# EAGLE board ODGIRON_steel_0412 - 副本 (EAGLE 9.6.0), part 1 of 2
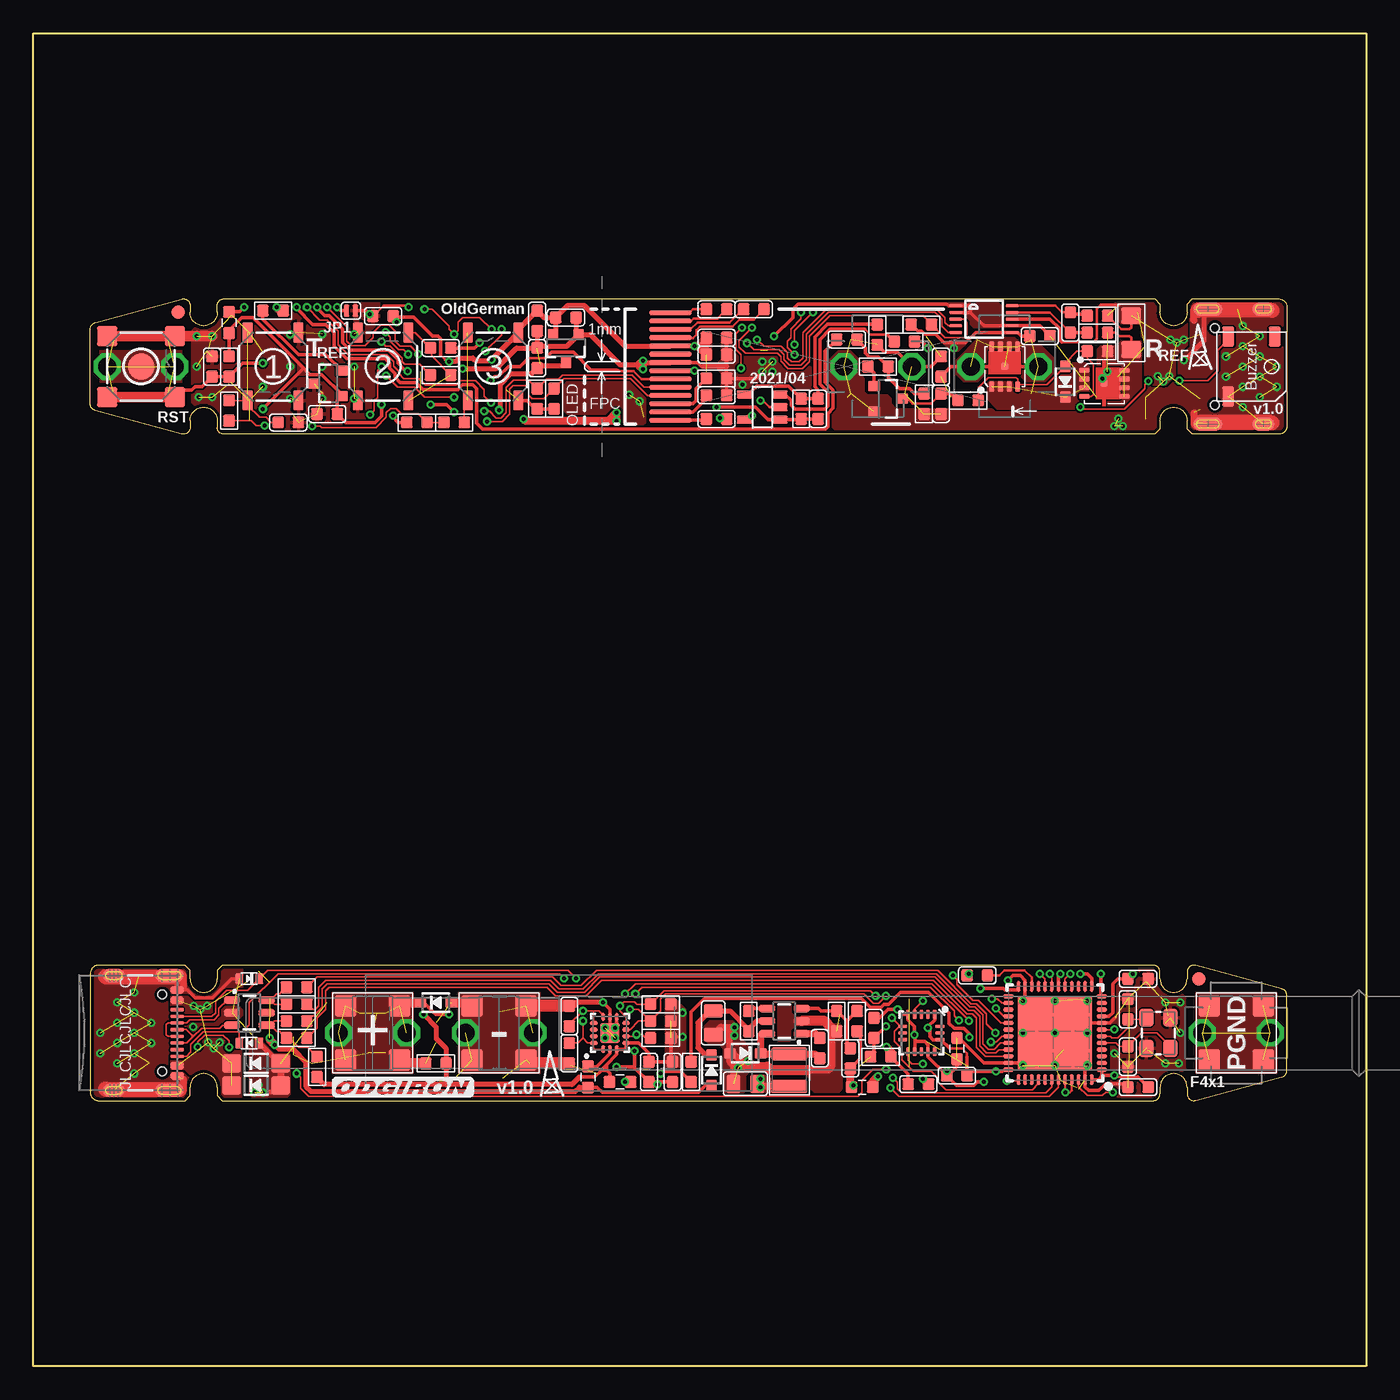
[diagram p0: board, top side]
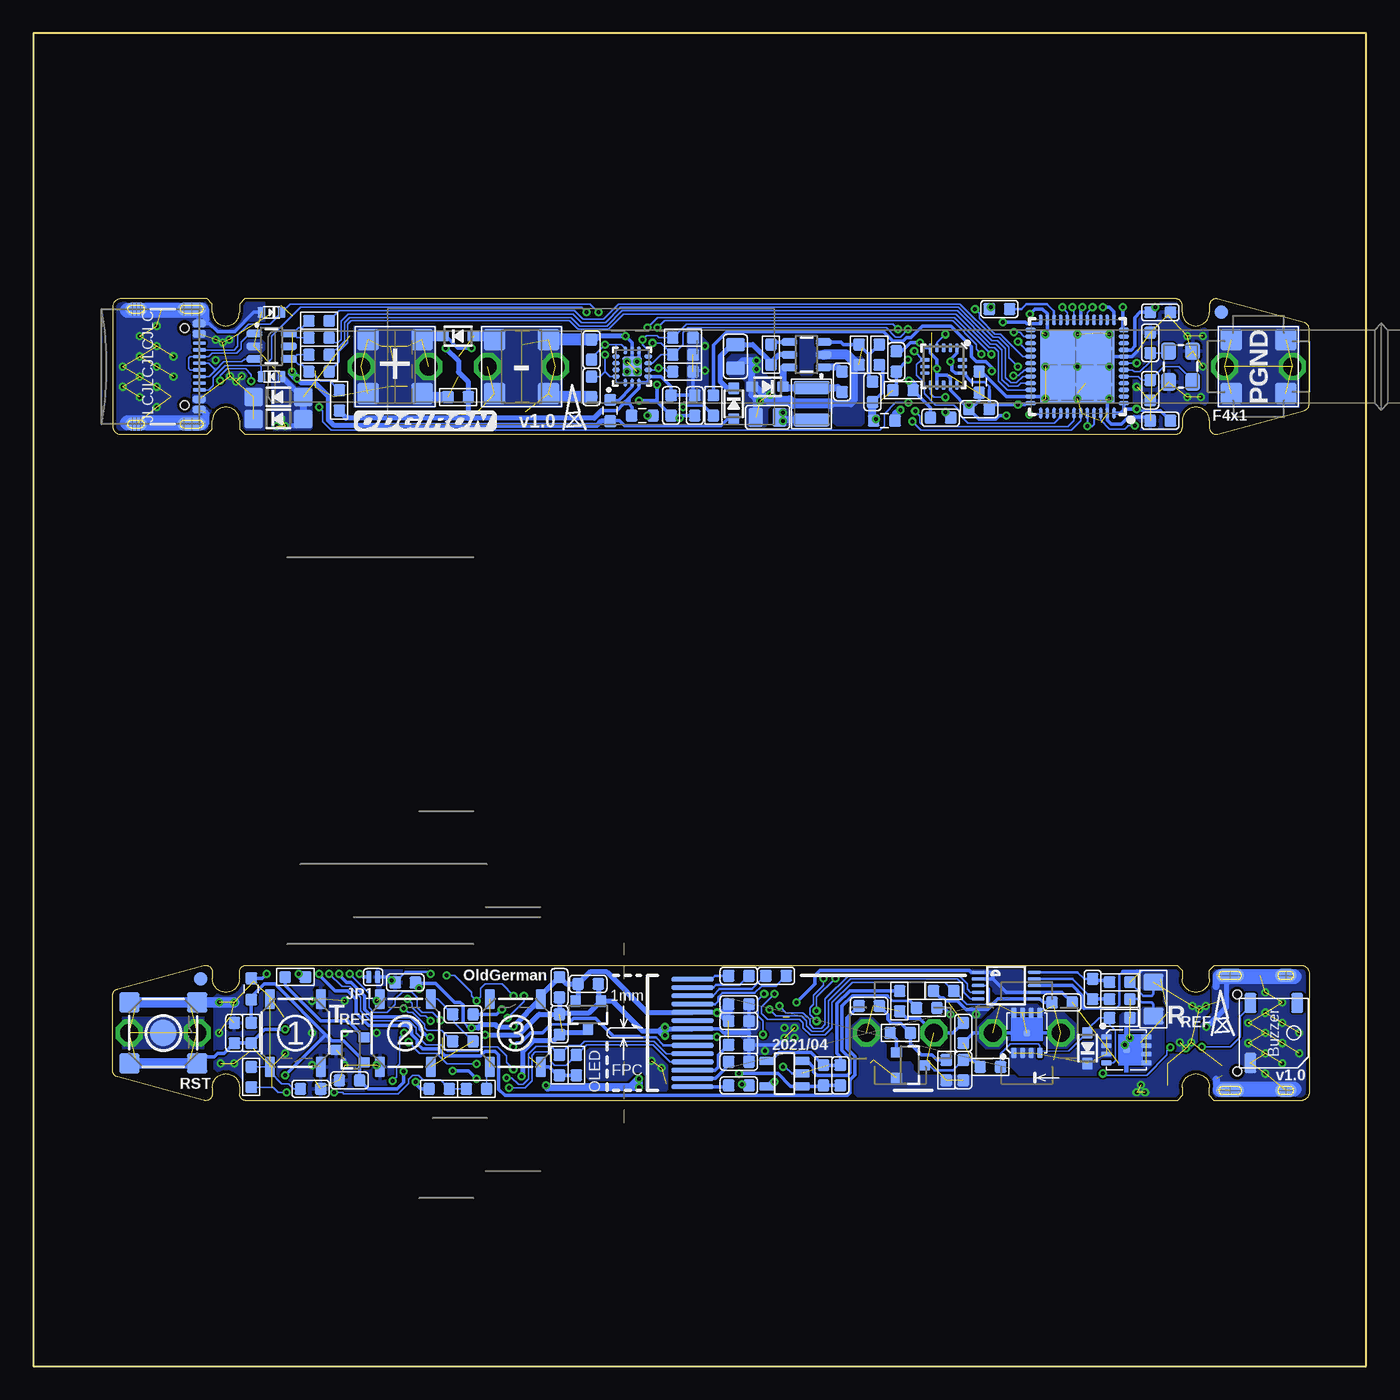
[diagram p1: board, bottom side, seen from below]

Size 100 x 100 mm. Coordinates in mm from the lower left corner, seen from the top.
Outline: 100,0 0,0 0,100 100,100 100,0
Outline: 13.79,29.7 13.79,29.06 arc-180 11.76,29.06 11.76,29.7 11.38,30.08 4.91,30.08 arc90 4.27,29.45 4.27,20.55 arc90 4.91,19.92 11.38,19.92 11.76,20.3 11.76,20.94 arc-180 13.79,20.94 13.79,20.3 14.18,19.92 84.03,19.92 arc90 84.53,20.43 84.53,20.94 arc-180 86.57,20.94 86.57,20.43 arc105 87.21,19.94 93.68,21.7 arc75 94.06,22.21 94.06,27.79 arc75 93.68,28.3 87.21,30.06 arc105 86.57,29.57 86.57,29.06 arc-180 84.53,29.06 84.53,29.57 arc90 84.03,30.08 14.18,30.08 13.79,29.7
Outline: 84.53,79.7 84.53,79.06 arc180 86.57,79.06 86.57,79.7 86.95,80.08 93.42,80.08 arc-90 94.06,79.44 94.06,70.56 arc-90 93.42,69.92 86.95,69.92 86.57,70.3 86.57,70.94 arc180 84.53,70.94 84.53,70.3 84.15,69.92 14.3,69.92 arc-90 13.79,70.43 13.79,70.94 arc180 11.76,70.94 11.76,70.43 arc-105 11.12,69.94 4.65,71.7 arc-75 4.27,72.21 4.27,77.79 arc-75 4.65,78.3 11.12,80.06 arc-105 11.76,79.57 11.76,79.06 arc180 13.79,79.06 13.79,79.57 arc-90 14.3,80.08 84.15,80.08 84.53,79.7
Copper layers (1*16): Top 0.035mm / dielectric 1.5mm / Bottom 0.035mm
Design rules "default *": minimum track width 5mil, minimum drill 0.3mm, track to track 5mil, track to pad 6mil, pad to pad 6mil, via to via 6mil, smd to smd 5mil, copper to edge 10mil, drill to drill 10mil, minimum pad ring 10mil, minimum via ring 6mil, stop-mask expansion 1mil, vias tented up to drill 20mil, thermal gap 8mil
tRestrict: 12 lines
bRestrict: 12 lines

## Footprints (pad centres in the part's own frame; a part is rotated, then mirrored left to right if it is on the bottom)
SOT23-5 = smd 0.6 x 1.2: 1 -0.95,-1.306; 2 0,-1.306; 3 0.95,-1.306; 4 0.95,1.306; 5 -0.95,1.306
BUZZER_5020 = smd 1.5 x 0.9: + -2.25,-1.75; - 2.25,-1.75; NC -2.25,1.75
C0603 = smd 0.889 x 0.889: 1 -0.762,0; 2 0.762,0
C0805 = smd 1.016 x 1.397: 1 -0.889,0; 2 0.889,0
FUSE_CLIPS_01 = drill 1.35 pad 2 octagon: 1A -2.54,0; 1B 2.54,0
SOD-323 = smd 0.9 x 0.8: A 1.15,0; C -1.15,0
SOD-123 = smd 1.4 x 1.4: A 1.85,0; C -1.85,0
SOD-523 = smd 0.8 x 0.6: A 0,-0.75; K 0,0.75
MSOP10 = smd 0.25 x 1: 1 -1,-2.113; 2 -0.5,-2.113; 3 0,-2.113; 4 0.5,-2.113; 5 1,-2.113; 6 1,2.113; 7 0.5,2.113; 8 0,2.113; 9 -0.5,2.113; 10 -1,2.113
F0603 = smd 0.889 x 0.889: 1 -0.8,0; 2 0.8,0
FIDUCIAL_1MM = smd 1 x 1: 1 0,0
USB-C-16P = smd 0.28 x 1: A5 -1.25,-0.34; A6 -0.25,-0.34; A7 0.25,-0.34; A8 1.25,-0.34; B5 1.75,-0.34; B6 0.75,-0.34; B7 -0.75,-0.34; B8 -1.75,-0.34 | smd 0.56 x 1: GND -3.225,-0.34; GND2 3.225,-0.34; VBUS1 -2.45,-0.34; VBUS2 2.45,-0.34 | smd 1 x 2.1: SHLD1 -4.32,-0.915; SHLD2 4.32,-0.915 | smd 1 x 2.1 bottom: SHLD3 -4.32,-0.915; SHLD4 4.32,-0.915 | smd 1 x 1.6: SHLD5 -4.32,-5.095; SHLD8 4.32,-5.095 | smd 1 x 1.6 bottom: SHLD6 -4.32,-5.095; SHLD7 4.32,-5.095 | hole 0.65: -2.89,-1.445; 2.89,-1.445
SMT-JUMPER_2_NO_SILK = smd 0.406 x 0.889: 1 -0.33,0; 2 0.33,0
SMD,3.2X2.5X2.5MM = smd 0.95 x 2.7: 1 1.225,0; 2 -1.225,0
0.87INCH_128X32_OLED_SSD1306 = smd 3.2 x 0.35: 1 -2.888,-4.03; 2 -2.888,-3.41; 3 -2.888,-2.79; 4 -2.888,-2.17; 5 -2.888,-1.55; 6 -2.888,-0.93; 7 -2.888,-0.31; 8 -2.888,0.31; 9 -2.888,0.93; 10 -2.888,1.55; 11 -2.888,2.17; 12 -2.888,2.79; 13 -2.888,3.41; 14 -2.888,4.03
TP16SQ = smd 1.6 x 1.6: TP 0,0
DFN8P-0.65-3X3X0.8MM = smd 0.8 x 0.4: 1 -1.5,0.975; 2 -1.5,0.325; 3 -1.5,-0.325; 4 -1.5,-0.975; 5 1.5,-0.975; 6 1.5,-0.325; 7 1.5,0.325; 8 1.5,0.975 | smd 0.508 x 0.508: 9 0,0
SOT23-3 = smd 0.8 x 0.9: 1 -0.95,-1; 2 0.95,-1; 3 0,1.1
R0603 = smd 0.889 x 0.889: 1 -0.762,0; 2 0.762,0
R1206 = smd 1.27 x 1.524: 1 -1.27,0; 2 1.27,0
TACTILE_SWITCH_SMD = smd 1.524 x 0.762: 1 -2.54,1.905; 2 2.54,1.905; 3 -2.54,-1.905; 4 2.54,-1.905
TACTILE_SWITCH_SMD' = smd 1.524 x 1.524: 1 -2.54,2.286; 2 2.54,2.286; 3 -2.54,-2.286; 4 2.54,-2.286
HAKKO_T12_K-TYPE_WITH_FUSE_CLIPS_X2 = drill 1.35 pad 2 octagon: 1A 6.96,0; 1A1 16.46,0; 1B 12.04,0; 1B1 21.54,0
TESTPOINT_ROUND_2MM = smd 2 x 2: P$1 0,0
QFN14-2.5X2.5MM = smd 0.58 x 0.3: 1 -1.215,0.5; 2 -1.215,0; 3 -1.215,-0.5; 8 1.215,-0.5; 9 1.215,0; 10 1.215,0.5 | smd 0.3 x 0.58: 4 -0.75,-1.215; 5 -0.25,-1.215; 6 0.25,-1.215; 7 0.75,-1.215; 11 0.75,1.215; 12 0.25,1.215; 13 -0.25,1.215; 14 -0.75,1.215 | smd 1.45 x 1.45: THERMAL 0,0
QFN48_7X7MM_0.5MM = smd 0.8 x 0.3: 1 -3.5,2.75; 2 -3.5,2.25; 3 -3.5,1.75; 4 -3.5,1.25; 5 -3.5,0.75; 6 -3.5,0.25; 7 -3.5,-0.25; 8 -3.5,-0.75; 9 -3.5,-1.25; 10 -3.5,-1.75; 11 -3.5,-2.25; 12 -3.5,-2.75; 25 3.5,-2.75; 26 3.5,-2.25; 27 3.5,-1.75; 28 3.5,-1.25; 29 3.5,-0.75; 30 3.5,-0.25; 31 3.5,0.25; 32 3.5,0.75; 33 3.5,1.25; 34 3.5,1.75; 35 3.5,2.25; 36 3.5,2.75 | smd 0.3 x 0.8: 13 -2.75,-3.5; 14 -2.25,-3.5; 15 -1.75,-3.5; 16 -1.25,-3.5; 17 -0.75,-3.5; 18 -0.25,-3.5; 19 0.25,-3.5; 20 0.75,-3.5; 21 1.25,-3.5; 22 1.75,-3.5; 23 2.25,-3.5; 24 2.75,-3.5; 37 2.75,3.5; 38 2.25,3.5; 39 1.75,3.5; 40 1.25,3.5; 41 0.75,3.5; 42 0.25,3.5; 43 -0.25,3.5; 44 -0.75,3.5; 45 -1.25,3.5; 46 -1.75,3.5; 47 -2.25,3.5; 48 -2.75,3.5 | smd 5.6 x 5.6: P$1 0,0
SOT23-6 = smd 0.55 x 1.2: 1 0.95,1.3; 2 0,1.3; 3 -0.95,1.3; 4 -0.95,-1.3; 5 0,-1.3; 6 0.95,-1.3
SOT23-3@1 = smd 0.8 x 0.9: 1 -0.95,-1; 2 0.95,-1; 3 0,1.1
LGA-16-3X3 = smd 0.7 x 0.28: 1 -1.4,1; 2 -1.4,0.5; 3 -1.4,0; 4 -1.4,-0.5; 5 -1.4,-1; 9 1.4,-1; 10 1.4,-0.5; 11 1.4,0; 12 1.4,0.5; 13 1.4,1 | smd 0.28 x 0.7: 6 -0.5,-1.4; 7 0,-1.4; 8 0.5,-1.4; 14 0.5,1.4; 15 0,1.4; 16 -0.5,1.4
3.2X2.5_KX-7 = smd 1.3 x 1.1: 1 -1.15,-0.9; 2 1.15,-0.9; 3 1.15,0.9; 4 -1.15,0.9

## Placement (x,y rotation side)
AMP1  SGM8551XN5G/TR  [SOT23-5]  43.64,21.95 90 bottom
AMP2  SGM8551XN5G/TR  [SOT23-5]  54.69,71.95 90 top
BUZ1  [BUZZER_5020]  6.94,25 270 bottom
BUZ2  [BUZZER_5020]  91.39,75 270 top
C1  0.1uF/50V  [C0603]  20.53,28.3 270 bottom
C2  0.1uF/50V  [C0603]  46.18,22.08 270 top
C3  0.1uF/50V  [C0603]  79.2,20.81 0 bottom
C4  0.1uF/50V  [C0603]  22.81,27.29 0 bottom
C5  0.1uF/50V  [C0603]  76.28,21.44 180 bottom
C6  0.1uF/50V  [C0603]  67.77,26.4 0 bottom
C7  4.7uF/16V  [C0603]  66.4,21.16 0 top
C8  10pF/50V  [C0603]  82.12,23.22 90 top
C9  10pF/50V  [C0603]  82.12,26.78 270 top
C10  0.1uF/50V  [C0603]  84.92,25 90 bottom
C11  0.1uF/50V  [C0603]  82.88,29.06 180 top
C12  0.1uF/50V  [C0603]  72.09,28.78 0 bottom
C13  0.1uF/50V  [C0603]  69.29,21.8 0 top
C14  0.1uF/50V  [C0603]  82.88,20.94 0 top
C15  1uF/16V  [C0603]  47.96,22.08 270 top
C16  0.1uF/50V  [C0603]  30.23,22.21 90 bottom
C17  10nF/50V  [C0603]  37.29,27.03 180 bottom
C18  470pF/50V  [C0603]  40.21,23.48 270 top
C19  470pF/50V  [C0603]  40.21,26.27 90 top
C20  10uF/10V  [C0603]  63.07,25.38 270 top
C21  1uF/16V  [C0603]  47.07,29.29 0 bottom
C22  1uF/16V  [C0603]  44.27,29.29 0 bottom
C23  4.7uF/16V  [C0603]  47.07,27.16 180 bottom
C24  1uF/16V  [C0603]  47.07,25.89 180 bottom
C25  10uF/10V  [C0603]  47.07,22.84 0 bottom
C26  10uF/10V  [C0603]  47.07,21.06 0 bottom
C27  10nF/50V  [C0603]  30.23,25 90 bottom
C28  10pF/50V  [C0603]  16.21,76.78 270 bottom
C29  0.1uF/50V  [C0603]  59.01,23.86 270 top
C30  10uF/25V  [C0805]  53.42,21.19 180 top
C31  1uF/16V  [C0603]  60.53,25.64 270 bottom
C32  2.2uF/16V  [C0603]  70.82,29.32 180 top
C33  4.7uF/50V  [C0805]  51.01,25.76 270 top
C34  100pF/50V  [C0603]  39.45,21.82 90 bottom
C35  100pF/50V  [C0603]  61.29,23.09 90 top
C36  10pF/50V  [C0603]  16.21,73.22 90 bottom
C37  10uF/10V  [C0603]  60.53,28.43 90 bottom
C38  0.1uF/50V  [C0603]  15.45,79.06 180 bottom
C39  1uF/16V  [C0603]  58.37,28.68 180 bottom
C40  0.1uF/50V  [C0603]  26.24,78.78 0 top
C41  0.1uF/50V  [C0603]  29.04,71.8 0 bottom
C42  0.1uF/50V  [C0603]  15.45,70.94 0 bottom
C43  0.1uF/50V  [C0603]  52.15,72.08 270 bottom
C44  1uF/16V  [C0603]  50.37,72.08 270 bottom
C45  470pF/50V  [C0603]  58.12,73.48 270 bottom
C46  470pF/50V  [C0603]  58.12,76.27 90 bottom
C47  1uF/16V  [C0603]  51.26,79.29 0 top
C48  1uF/16V  [C0603]  54.05,79.29 0 top
C49  4.7uF/16V  [C0603]  51.26,77.16 180 top
C50  1uF/16V  [C0603]  51.26,75.89 180 top
C51  4.7uF/50V  [C0805]  47.32,75.76 270 bottom
C52  0.1uF/50V  [C0603]  77.8,78.3 270 top
C53  0.1uF/50V  [C0603]  75.52,77.29 0 top
C54  0.1uF/50V  [C0603]  22.05,71.44 180 top
C55  10nF/50V  [C0603]  68.1,75 90 top
C56  100pF/50V  [C0603]  58.88,71.83 90 top
C57  10uF/25V  [C0805]  44.91,71.19 180 bottom
C58  0.1uF/50V  [C0603]  19.13,70.81 0 top
C59  0.1uF/50V  [C0603]  68.1,72.21 90 top
C60  10nF/50V  [C0603]  61.04,77.03 180 top
C61  0.1uF/50V  [C0603]  39.32,73.86 270 bottom
C62  10uF/10V  [C0603]  51.26,72.84 0 top
C63  10uF/10V  [C0603]  51.26,71.06 0 top
C64  1uF/16V  [C0603]  37.8,75.64 270 top
C65  10uF/10V  [C0603]  37.8,78.43 90 top
C66  1uF/16V  [C0603]  39.96,78.68 180 top
C67  10uF/10V  [C0603]  35.26,75.38 270 bottom
C68  0.1uF/50V  [C0603]  30.56,76.4 0 top
C69  4.7uF/16V  [C0603]  31.93,71.16 0 bottom
C70  0.1uF/50V  [C0603]  13.41,75 90 top
C71  2.2uF/16V  [C0603]  27.51,79.32 180 bottom
C72  100pF/50V  [C0603]  37.04,73.09 90 bottom
CP1  [FUSE_CLIPS_01]  90.25,25 0 top
CP2  [FUSE_CLIPS_01]  8.08,75 0 bottom
D1  B5819WS  [SOD-323]  50.88,22.21 270 top
D2  SMF24A  [SOD-123]  16.72,21.06 0 top
D3  MMSZ5242BS-7-F  [SOD-323]  20.91,23.86 90 bottom
D4  B5819WS  [SOD-323]  44.91,73.48 180 bottom
D5  SMF24A  [SOD-123]  16.72,22.71 0 top
D6  ESD5B5.0ST1  [SOD-523]  16.21,24.24 90 top
D7  B5819WS  [SOD-323]  53.42,23.48 180 top
D8  ESD5B5.0ST1  [SOD-523]  16.21,29.06 270 top
D9  B5819WS  [SOD-323]  30.2,27.29 0 top
D10  MMSZ5242BS-7-F  [SOD-323]  77.42,73.86 90 top
D11  SMF24A  [SOD-123]  81.61,71.06 0 bottom
D12  SMF24A  [SOD-123]  81.61,72.71 0 bottom
D13  ESD5B5.0ST1  [SOD-523]  82.12,74.24 90 bottom
D14  ESD5B5.0ST1  [SOD-523]  82.12,79.06 270 bottom
D15  B5819WS  [SOD-323]  47.45,72.21 270 bottom
D16  B5819WS  [SOD-323]  68.13,77.29 0 bottom
DA1  INA226  [MSOP10]  27,28.56 270 bottom
DA2  INA226  [MSOP10]  71.33,78.56 270 top
FB1  1K  [F0603]  62.18,20.94 0 top
FB2  1K  [F0603]  83.64,28.3 270 bottom
FB3  1K  [F0603]  44.02,21.32 180 top
FB4  1K  [F0603]  69.29,23.83 90 top
FB5  1K  [F0603]  41.61,21.7 270 top
FB6  1K  [F0603]  14.68,78.3 270 top
FB7  1K  [F0603]  36.15,70.94 0 bottom
FB8  1K  [F0603]  54.31,71.32 180 bottom
FB9  1K  [F0603]  29.04,73.83 90 bottom
FB10  1K  [F0603]  56.72,71.7 270 bottom
FID1  FIDUCIAL  [FIDUCIAL_1MM]  87.45,29.06 0 top
FID2  FIDUCIAL  [FIDUCIAL_1MM]  87.45,29.06 0 bottom
FID3  FIDUCIAL  [FIDUCIAL_1MM]  10.87,79.06 0 bottom
FID4  FIDUCIAL  [FIDUCIAL_1MM]  10.87,79.06 0 top
J1  [USB-C-16P]  87.2,75 270 bottom
J3  [USB-C-16P]  11.13,25 270 top
JP1  [SMT-JUMPER_2_NO_SILK]  74.5,29.19 180 bottom
JP2  [SMT-JUMPER_2_NO_SILK]  23.83,79.19 180 top
L1  33uH CBC3225T330KR  [SMD,3.2X2.5X2.5MM]  56.72,22.21 90 top
L2  33uH CBC3225T330KR  [SMD,3.2X2.5X2.5MM]  41.61,72.21 90 bottom
LCD1  0.87inch SSD1306  [0.87INCH_128X32_OLED_SSD1306]  53.42,25 180 bottom
LCD2  0.87inch SSD1306  [0.87INCH_128X32_OLED_SSD1306]  44.91,75 180 top
LOGO1  OSHW-LOGONO_SILK  [DUMMY]  3.89,18.78 0 top
PAD1  PADTP16SQ  [TP16SQ]  23.45,27.03 0 top
PAD2  PADTP16SQ  [TP16SQ]  27.49,27.03 0 top
PAD3  PADTP16SQ  [TP16SQ]  23.45,22.97 0 top
PAD4  PADTP16SQ  [TP16SQ]  27.49,22.97 0 top
PAD5  PADTP16SQ  [TP16SQ]  32.92,27.03 0 top
PAD6  PADTP16SQ  [TP16SQ]  32.92,22.97 0 top
PAD7  PADTP16SQ  [TP16SQ]  36.99,27.03 0 top
PAD8  PADTP16SQ  [TP16SQ]  36.99,22.97 0 top
PAD9  PADTP16SQ  [TP16SQ]  92.28,22.97 0 top
PAD10  PADTP16SQ  [TP16SQ]  88.22,27.03 0 top
PAD11  PADTP16SQ  [TP16SQ]  88.22,22.97 0 top
PAD12  PADTP16SQ  [TP16SQ]  92.28,27.03 0 top
PAD13  PADTP16SQ  [TP16SQ]  74.88,77.03 0 bottom
PAD14  PADTP16SQ  [TP16SQ]  70.84,77.03 0 bottom
PAD15  PADTP16SQ  [TP16SQ]  74.88,72.97 0 bottom
PAD16  PADTP16SQ  [TP16SQ]  70.84,72.97 0 bottom
PAD17  PADTP16SQ  [TP16SQ]  65.41,77.03 0 bottom
PAD18  PADTP16SQ  [TP16SQ]  65.41,72.97 0 bottom
PAD19  PADTP16SQ  [TP16SQ]  61.34,77.03 0 bottom
PAD20  PADTP16SQ  [TP16SQ]  61.34,72.97 0 bottom
PAD21  PADTP16SQ  [TP16SQ]  6.05,72.97 0 bottom
PAD22  PADTP16SQ  [TP16SQ]  10.11,77.03 0 bottom
PAD23  PADTP16SQ  [TP16SQ]  10.11,72.97 0 bottom
PAD24  PADTP16SQ  [TP16SQ]  6.05,77.03 0 bottom
Q1  AON7403  [DFN8P-0.65-3X3X0.8MM]  72.88,75 90 top
Q2  AON7403  [DFN8P-0.65-3X3X0.8MM]  17.99,23.73 0 bottom
Q3  AON7403  [DFN8P-0.65-3X3X0.8MM]  25.45,25 90 bottom
Q4  S8050  [SOT23-3]  34.24,22.59 270 bottom
Q5  AON7403  [DFN8P-0.65-3X3X0.8MM]  80.34,73.73 0 top
Q6  S8050  [SOT23-3]  64.09,72.59 270 top
R1  32.4K  [R0603]  60.28,25.89 90 top
R2  124K  [R0603]  61.8,25.89 90 top
R3  4.7K  [R0603]  47.07,25.89 180 top
R4  1.5K  [R0603]  21.29,22.46 270 top
R5  22R  [R0603]  19.76,25.89 0 top
R6  22R  [R0603]  19.76,27.16 0 top
R7  1K  [R0603]  66.75,20.81 0 bottom
R8  100K  [R0603]  69.55,20.81 180 bottom
R9  10K  [R0603]  83.64,21.7 90 bottom
R10  4.7K  [R0603]  18.49,26.14 180 bottom
R11  10K  [R0603]  34.95,25 0 bottom
R12  1K  [R0603]  31.5,22.21 90 bottom
R13  32.4K  [R0603]  30.2,22.71 0 top
R14  10K  [R0603]  67.77,24.36 0 bottom
R15  1.5K  [R0603]  77.04,72.46 270 bottom
R16  4.7K  [R0603]  47.07,24.62 180 top
R17  560K  [R0603]  47.07,24.11 180 bottom
R18  4.7K  [R0603]  59.26,22.59 270 bottom
R19  4.7K  [R0603]  60.53,22.59 270 bottom
R20  100K  [R0603]  53.67,25.89 270 top
R21  10K  [R0603]  14.68,71.7 90 top
R22  4.7K  [R0603]  63.58,23.22 180 top
R23  1K  [R0603]  83.64,25 90 bottom
R24  10mR ±1% ±50ppm/℃  [R1206]  15.95,27.54 90 bottom
R25  4.7K  [R0603]  47.07,27.16 180 top
R26  1K  [R0603]  31.57,70.81 0 top
R27  22R  [R0603]  19.76,24.62 0 top
R28  22R  [R0603]  19.76,28.43 0 top
R29  100K  [R0603]  28.78,70.81 180 top
R30  22R  [R0603]  78.56,75.89 0 bottom
R31  22R  [R0603]  78.56,77.16 0 bottom
R32  4.7K  [R0603]  51.26,77.16 180 bottom
R33  4.7K  [R0603]  51.26,75.89 180 bottom
R34  4.7K  [R0603]  51.26,74.62 180 bottom
R35  4.7K  [R0603]  28.2,22.46 180 bottom
R36  10R  [R0603]  18.49,28.81 0 bottom
R37  10R  [R0603]  18.49,27.54 0 bottom
R38  10K  [R0603]  31.7,28.15 0 bottom
R39  560K  [R0603]  51.26,74.11 180 top
R40  4.7K  [R0603]  39.07,72.59 270 top
R41  1K  [R0603]  80.34,29.19 180 bottom
R42  100K  [R0603]  32.97,26.88 0 bottom
R43  2.37K ±0.1% ±25ppm/℃  [R0603]  35,27.39 270 bottom
R44  750K ±0.1% ±25ppm/℃  [R0603]  40.72,21.82 90 bottom
R45  1K  [R0603]  49.35,22.08 270 top
R46  4.7K  [R0603]  37.8,72.59 270 top
R47  4.7K  [R0603]  34.75,73.22 180 bottom
R48  100K  [R0603]  44.66,75.89 270 bottom
R49  32.4K  [R0603]  38.05,75.89 90 bottom
R50  124K  [R0603]  36.53,75.89 90 bottom
R51  22R  [R0603]  78.56,74.62 0 bottom
R52  22R  [R0603]  78.56,78.43 0 bottom
R53  4.7K  [R0603]  70.13,72.46 180 top
R54  10R  [R0603]  79.83,78.81 0 top
R55  10R  [R0603]  79.83,77.54 0 top
R56  1K  [R0603]  17.99,79.19 180 top
R57  100K  [R0603]  65.36,76.88 0 top
R58  2.37K ±0.1% ±25ppm/℃  [R0603]  63.33,77.39 270 top
R59  750K ±0.1% ±25ppm/℃  [R0603]  57.61,71.83 90 top
R60  1K  [R0603]  48.97,72.08 270 bottom
R61  10mR ±1% ±50ppm/℃  [R1206]  82.38,77.54 90 top
R62  4.7K  [R0603]  79.83,76.14 180 top
R63  10K  [R0603]  63.38,75 0 top
R64  1K  [R0603]  66.83,72.21 90 top
R65  10K  [R0603]  66.63,78.15 0 top
R66  10K  [R0603]  30.56,74.36 0 top
R67  1K  [R0603]  14.68,75 90 top
R68  32.4K  [R0603]  68.13,72.71 0 bottom
S1  [TACTILE_SWITCH_SMD]  80.34,25 270 bottom
S2  [TACTILE_SWITCH_SMD]  72.09,25 90 bottom
S3  [TACTILE_SWITCH_SMD]  63.83,25 90 bottom
S4  [TACTILE_SWITCH_SMD]  34.5,75 90 top
S5  [TACTILE_SWITCH_SMD']  90.25,25 0 bottom
S6  [TACTILE_SWITCH_SMD]  17.99,75 270 top
S7  [TACTILE_SWITCH_SMD]  26.24,75 90 top
S8  [TACTILE_SWITCH_SMD']  8.08,75 0 top
T1  [HAKKO_T12_K-TYPE_WITH_FUSE_CLIPS_X2]  15.95,25 0 top
T2  [HAKKO_T12_K-TYPE_WITH_FUSE_CLIPS_X2]  82.38,75 0 bottom
TP1  PGND  [TESTPOINT_ROUND_2MM]  90.25,25 0 bottom
TP2  PGND  [TESTPOINT_ROUND_2MM]  8.08,75 0 top
U1  FUSB302BMPX  [QFN14-2.5X2.5MM]  43.26,25 90 top
U3  STM32F4x1CxU6  [QFN48_7X7MM_0.5MM]  76.66,25 180 top
U4  MP2456GJ  [SOT23-6]  56.34,25.89 270 top
U5  MCP9700AT-E/TT,or LM50CIM3X  [SOT23-3@1]  76.18,23.73 90 bottom
U6  MCP1700T-3302E/TT  [SOT23-3]  58.37,26.4 180 bottom
U8  LIS3DH  [LGA-16-3X3]  66.63,25 270 top
U12  STM32F4x1CxU6  [QFN48_7X7MM_0.5MM]  21.67,75 180 bottom
U13  FUSB302BMPX  [QFN14-2.5X2.5MM]  55.07,75 90 bottom
U14  MP2456GJ  [SOT23-6]  41.99,75.89 270 bottom
U15  MCP9700AT-E/TT,or LM50CIM3X  [SOT23-3@1]  22.15,73.73 90 top
U16  MCP1700T-3302E/TT  [SOT23-3]  39.96,76.4 180 top
U17  LIS3DH  [LGA-16-3X3]  31.7,75 270 bottom
VD1  USBLC6-2SC6  [SOT23-6]  16.21,26.52 90 top
VD2  USBLC6-2SC6  [SOT23-6]  82.12,76.52 90 bottom
ZO1  8MHz  [3.2X2.5_KX-7]  84.41,25 270 top
ZO2  8MHz  [3.2X2.5_KX-7]  13.92,75 270 bottom

## Library data of the parts
AMP1 AMP2 = TS100; MPN: OPA340NA/3KG4; OC_FARNELL: 1234805; OC_NEWARK: 13M5177
BUZ1 BUZ2 C1-C72 CP1 CP2 D1-D16 DA1 DA2 FB1-FB10 FID1-FID4 JP1 JP2 L1 L2 LCD1 LCD2 PAD1-PAD24 Q1-Q3 Q5 R1-R68 S1-S4 S6 S7 U4-U6 U14-U16 = TS100
J1 J3 = FUSB302; PROD_ID: CONN-14122
LOGO1 = SparkFun-Aesthetics
Q4 Q6 = SparkFun-DiscreteSemi; PROD_ID: TRANS-08049
S5 S8 = untitled
T1 T2 = T12_FUSE_CLIPS
TP1 TP2 = microbuilder
U1 U13 = FUSB302; PROD_ID: IC-12452
U3 U12 = STM32
U8 U17 = SparkFun-Sensors; PROD_ID: IC-13419; SF_ID: N/A
VD1 VD2 = ESD-protection
ZO1 ZO2 = DIP

## Nets
3.9V: C30.1 C35.1 FB1.1 L1.2 R2.1
3.9V1: C57.1 C72.1 FB7.1 L2.2 R50.1
+3V1: C40.2 C41.2 C42.2 C43.1 C44.1 C49.2 C50.2 C53.1 C54.1 C65.2 C66.2 C67.2 DA2.6 FB6.2 FB8.2 LCD2.5 LCD2.8 R15.2 R32.1 R33.1 R34.1 R40.2 R46.2 R47.2 R65.1 R67.2 R68.2 S4.3 S4.4 U12.1 U12.24 U12.36 U12.48 U13.3 U13.4 U15.1 U16.2 U17.1 U17.14
+3V3: C2.1 C4.1 C5.1 C12.2 C13.2 C14.2 C15.1 C20.2 C23.2 C24.2 C37.2 C39.2 DA1.6 FB2.2 FB3.2 LCD1.5 LCD1.8 R3.1 R4.2 R13.2 R16.1 R18.2 R19.2 R22.2 R23.2 R25.1 R38.1 S3.3 S3.4 U1.3 U1.4 U3.1 U3.24 U3.36 U3.48 U5.1 U6.2 U8.1 U8.14
ADC1: U8.16
ADC2: U8.15
ADC3: U8.13
ADC4: U17.16
ADC5: U17.15
ADC6: U17.13
AMP+: AMP1.3 R42.1
AMP+1: AMP2.3 R57.1
AMP-: AMP1.4 C34.2 R43.1 R44.2
AMP-1: AMP2.4 C56.2 R58.1 R59.2
BS: C29.1 U4.1
BS1: C61.1 U14.1
CC1: C18.1 D8.K J3.A5 U1.1 U1.14
CC2: C19.1 D6.K J3.B5 U1.10 U1.11
CC3: C46.1 D13.K J1.B5 U13.10 U13.11
CC4: C45.1 D14.K J1.A5 U13.1 U13.14
CS: U8.8
CS1: U17.8
D+: J3.A6 J3.B6 VD1.3
D+1: J1.A6 J1.B6 VD2.3
D-: J3.A7 J3.B7 VD1.1
D-1: J1.A7 J1.B7 VD2.1
DCDC_IN: C33.1 D1.C R20.2 U4.5
DCDC_IN1: C51.1 D15.C R48.2 U14.5
EN: R20.1 U4.4
EN1: R48.1 U14.4
GND: AMP1.2 BUZ1.- C2.2 C3.2 C4.2 C5.2 C6.2 C7.2 C8.1 C9.1 C10.2 C11.1 C12.1 C13.1 C14.1 C15.2 C16.1 C18.2 C19.2 C20.1 C23.1 C24.1 C25.2 C26.2 C27.2 C30.2 C31.1 C32.2 C33.2 C37.1 C39.1 D2.A D5.A D6.A D7.A D8.A D9.A DA1.1 DA1.2 DA1.7 FB4.1 FB4.2 J3.GND J3.GND2 J3.SHLD1 J3.SHLD2 J3.SHLD3 J3.SHLD4 J3.SHLD5 J3.SHLD6 J3.SHLD7 J3.SHLD8 JP1.1 LCD1.7 PAD5.TP PAD6.TP PAD7.TP PAD8.TP Q4.2 R1.1 R8.2 R12.1 R17.1 R43.2 S1.1 S1.2 S2.1 S2.2 S5.1 S5.2 T1.1A1 T1.1B1 U1.8 U1.9 U1.THERMAL U3.8 U3.23 U3.35 U3.47 U3.P$1 U4.2 U5.3 U6.1 U8.5 U8.10 U8.12 VD1.2 ZO1.2 ZO1.4
GND1: AMP2.2 BUZ2.- C28.1 C36.1 C38.1 C40.1 C41.1 C42.1 C43.2 C44.2 C45.2 C46.2 C49.1 C50.1 C51.2 C53.2 C54.2 C55.2 C57.2 C58.2 C59.1 C62.2 C63.2 C64.1 C65.1 C66.1 C67.1 C68.2 C69.2 C70.2 C71.2 D4.A D11.A D12.A D13.A D14.A D16.A DA2.1 DA2.2 DA2.7 FB9.1 FB9.2 J1.GND J1.GND2 J1.SHLD1 J1.SHLD2 J1.SHLD3 J1.SHLD4 J1.SHLD5 J1.SHLD6 J1.SHLD7 J1.SHLD8 JP2.1 LCD2.7 PAD17.TP PAD18.TP PAD19.TP PAD20.TP Q6.2 R29.2 R39.1 R49.1 R58.2 R64.1 S6.1 S6.2 S7.1 S7.2 S8.1 S8.2 T2.1A1 T2.1B1 U12.8 U12.23 U12.35 U12.47 U12.P$1 U13.8 U13.9 U13.THERMAL U14.2 U15.3 U16.1 U17.5 U17.10 U17.12 VD2.2 ZO2.2 ZO2.4
IT_ACCEL_1: U8.11
IT_ACCEL_2: U17.11
LDO_IN: C31.2 FB1.2 U6.3
LDO_IN1: C64.2 FB7.2 U16.3
N$11: R7.2 S3.1 S3.2
N$12: C11.2 FB2.1 U3.9
N$13: C21.2 LCD1.2
N$14: C22.2 LCD1.4
N$15: C25.1 LCD1.13
N$16: LCD1.12 R17.2
N$17: C26.1 LCD1.14
N$18: C35.2 R1.2 R2.2 U4.3
N$19: C22.1 LCD1.3
N$20: C21.1 LCD1.1
N$21: C3.1 R9.2 S1.3 S1.4
N$22: D3.C Q2.1 Q2.2 Q2.3 Q3.1 Q3.2 Q3.3
N$23: D3.A Q2.4 Q3.4 R10.2 R35.1
N$24: C16.2 Q4.3 R35.2
N$25: Q4.1 R11.1
N$26: C17.1 R11.2 R12.2
N$27: C6.1 R14.2 S2.3 S2.4
N$28: R4.1 R5.1 R27.1 VD1.4
N$30: C1.1 DA1.10 R36.1
N$32: C1.2 DA1.9 R37.1
N$35: R41.2 U5.2
N$36: R6.1 R28.1 VD1.6
N$37: FB5.1 U1.2
N$38: AMP1.5 FB3.1
N$39: JP1.2 U3.20
N$48: R26.2 S4.1 S4.2
N$49: C38.2 FB6.1 U12.9
N$50: C47.2 LCD2.2
N$51: C48.2 LCD2.4
N$52: C62.1 LCD2.13
N$55: LCD2.12 R39.2
N$56: C63.1 LCD2.14
N$57: C72.2 R49.2 R50.2 U14.3
N$58: C52.1 DA2.10 R54.1
N$59: C52.2 DA2.9 R55.1
N$60: C48.1 LCD2.3
N$61: C47.1 LCD2.1
N$62: C58.1 R21.2 S6.3 S6.4
N$63: D10.C Q1.1 Q1.2 Q1.3 Q5.1 Q5.2 Q5.3
N$64: D10.A Q1.4 Q5.4 R53.1 R62.2
N$65: C59.2 Q6.3 R53.2
N$66: Q6.1 R63.1
N$67: C60.1 R63.2 R64.2
N$68: R56.2 U15.2
N$69: C68.1 R66.2 S7.3 S7.4
N$70: R15.1 R30.1 R51.1 VD2.4
N$71: R31.1 R52.1 VD2.6
N$72: FB10.1 U13.2
N$73: AMP2.5 FB8.1
N$74: JP2.2 U12.20
NRST: C10.1 R23.1 S5.3 S5.4 U3.7
NRST1: C70.1 R67.1 S8.3 S8.4 U12.7
OSC_IN: C8.2 U3.5 ZO1.3
OSC_IN1: C36.2 U12.5 ZO2.3
OSC_OUT: C9.2 U3.6 ZO1.1
OSC_OUT1: C28.2 U12.6 ZO2.1
OUT: AMP1.1 C34.1 R44.1 R45.2
OUT1: AMP2.1 C56.1 R59.1 R60.2
PA0: U3.10
PA1: U3.11
PA2: U12.38
PA2/ADC1: R56.1 U12.12
PA2/ADC2: R41.1 U3.12
PA3: U12.14
PA3/T2C1: C60.2 U12.13
PA3/T2C4: C17.2 U3.13
PA4: U3.14
PA5: U3.15
PA6: U3.16
PA7: U12.10
PA7/T1CH1N/T3C1: BUZ2.+ U12.17
PA7/T1CH1N/T3C2: BUZ1.+ U3.17
PA8: U12.15
PA8/SCL1: DA2.5 R33.2 U12.29 U13.6 U17.4
PA8/SCL3: DA1.5 R3.2 U1.6 U3.29 U8.4
PA9: U12.11
PA9/T1C1: U12.30
PA9/T1C2: U3.30
PA10: U12.16
PA10/IT_ACCEL_1: U12.31 U17.9
PA10/IT_ACCEL_2: U3.31 U8.9
PA11/USB_DM: R6.2 U3.32
PA11/USB_DM1: R31.2 U12.32
PA12/USB_DP: R5.2 U3.33
PA12/USB_DP1: R30.2 U12.33
PA13/SWDIO: R27.2 U3.34
PA13/SWDIO1: R51.2 U12.34
PA14/SWCLK: R28.2 U3.37
PA14/SWCLK1: R52.2 U12.37
PA15: U3.38
PB0/ADC1: R60.1 U12.18
PB0/ADC8: R45.1 U3.18
PB1: U12.41
PB1/IT_FUSB1: R34.2 U12.19 U13.5
PB1/IT_FUSB302: R16.2 U1.5 U3.19
PB2: U12.25
PB3: U3.39
PB4: U12.21
PB4/SDA1: DA2.4 R32.2 U12.40 U13.7 U17.6
PB4/SDA3: DA1.4 R25.2 U1.7 U3.40 U8.6
PB5: U3.41
PB6: U12.39
PB6/SCL1: LCD1.10 R19.1 U3.42
PB6/SCL2: LCD2.10 R46.1 U12.42
PB7/SDA1: LCD1.11 R18.1 U3.43
PB7/SDA2: LCD2.11 R40.1 U12.43
PB8&BOOT0_S1: R26.1 R29.1 U12.44 U12.45
PB8&BOOT0_S3: R7.1 R8.1 U3.44 U3.45
PB9/S1: R9.1 U3.46
PB9/S2: R21.1 U12.46
PB10: U3.21
PB12: U3.25
PB13/IT_INA1: DA2.3 R65.2 U12.26
PB13/IT_INA226: DA1.3 R38.2 U3.26
PB14/MISO1: U12.27
PB14/MISO2: U3.27
PB15/S1: R66.1 U12.28
PB15/S2: R14.1 U3.28
PC1: U12.2
PC13: U3.2
PC14/OSC32_IN: U3.3
PC14/OSC32_IN1: U12.3
PC15/OSC32_OUT: U3.4
PC15/OSC32_OUT1: U12.4
PGND1: CP1.1A CP1.1B PAD9.TP PAD10.TP PAD11.TP PAD12.TP TP1.P$1
PGND2: CP2.1A CP2.1B PAD21.TP PAD22.TP PAD23.TP PAD24.TP TP2.P$1
RES_3.3V: C7.1 LCD1.9 R22.1
RES_3.3V1: C69.1 LCD2.9 R47.1
SAO/SDO/ADDR: U8.7
SAO/SDO/ADDR1: U17.7
SW: C29.2 D7.C L1.1 U4.6
SW1: C61.2 D4.C L2.1 U14.6
T12+: C27.1 D9.C PAD1.TP PAD2.TP PAD3.TP PAD4.TP Q3.5 Q3.6 Q3.7 Q3.8 Q3.9 R13.1 R42.2 T1.1A T1.1B
T12+1: C55.1 D16.C PAD13.TP PAD14.TP PAD15.TP PAD16.TP Q1.5 Q1.6 Q1.7 Q1.8 Q1.9 R57.2 R68.1 T2.1A T2.1B
VBREF: LCD1.6
VBREF1: LCD2.6
VBUS-C: D1.A FB5.2 Q2.5 Q2.6 Q2.7 Q2.8 Q2.9 R10.1 R24.1 R37.2
VBUS-C1: D15.A FB10.2 Q5.5 Q5.6 Q5.7 Q5.8 Q5.9 R55.2 R61.1 R62.1
VCAP1: C32.1 U3.22
VCAP2: C71.1 U12.22
VUSB_IN: D2.C D5.C DA1.8 J3.VBUS1 J3.VBUS2 R24.2 R36.2
VUSB_IN1: D11.C D12.C DA2.8 J1.VBUS1 J1.VBUS2 R54.2 R61.2